# EAGLE board POE_Power_Supply-Panel (EAGLE 9.6.2)
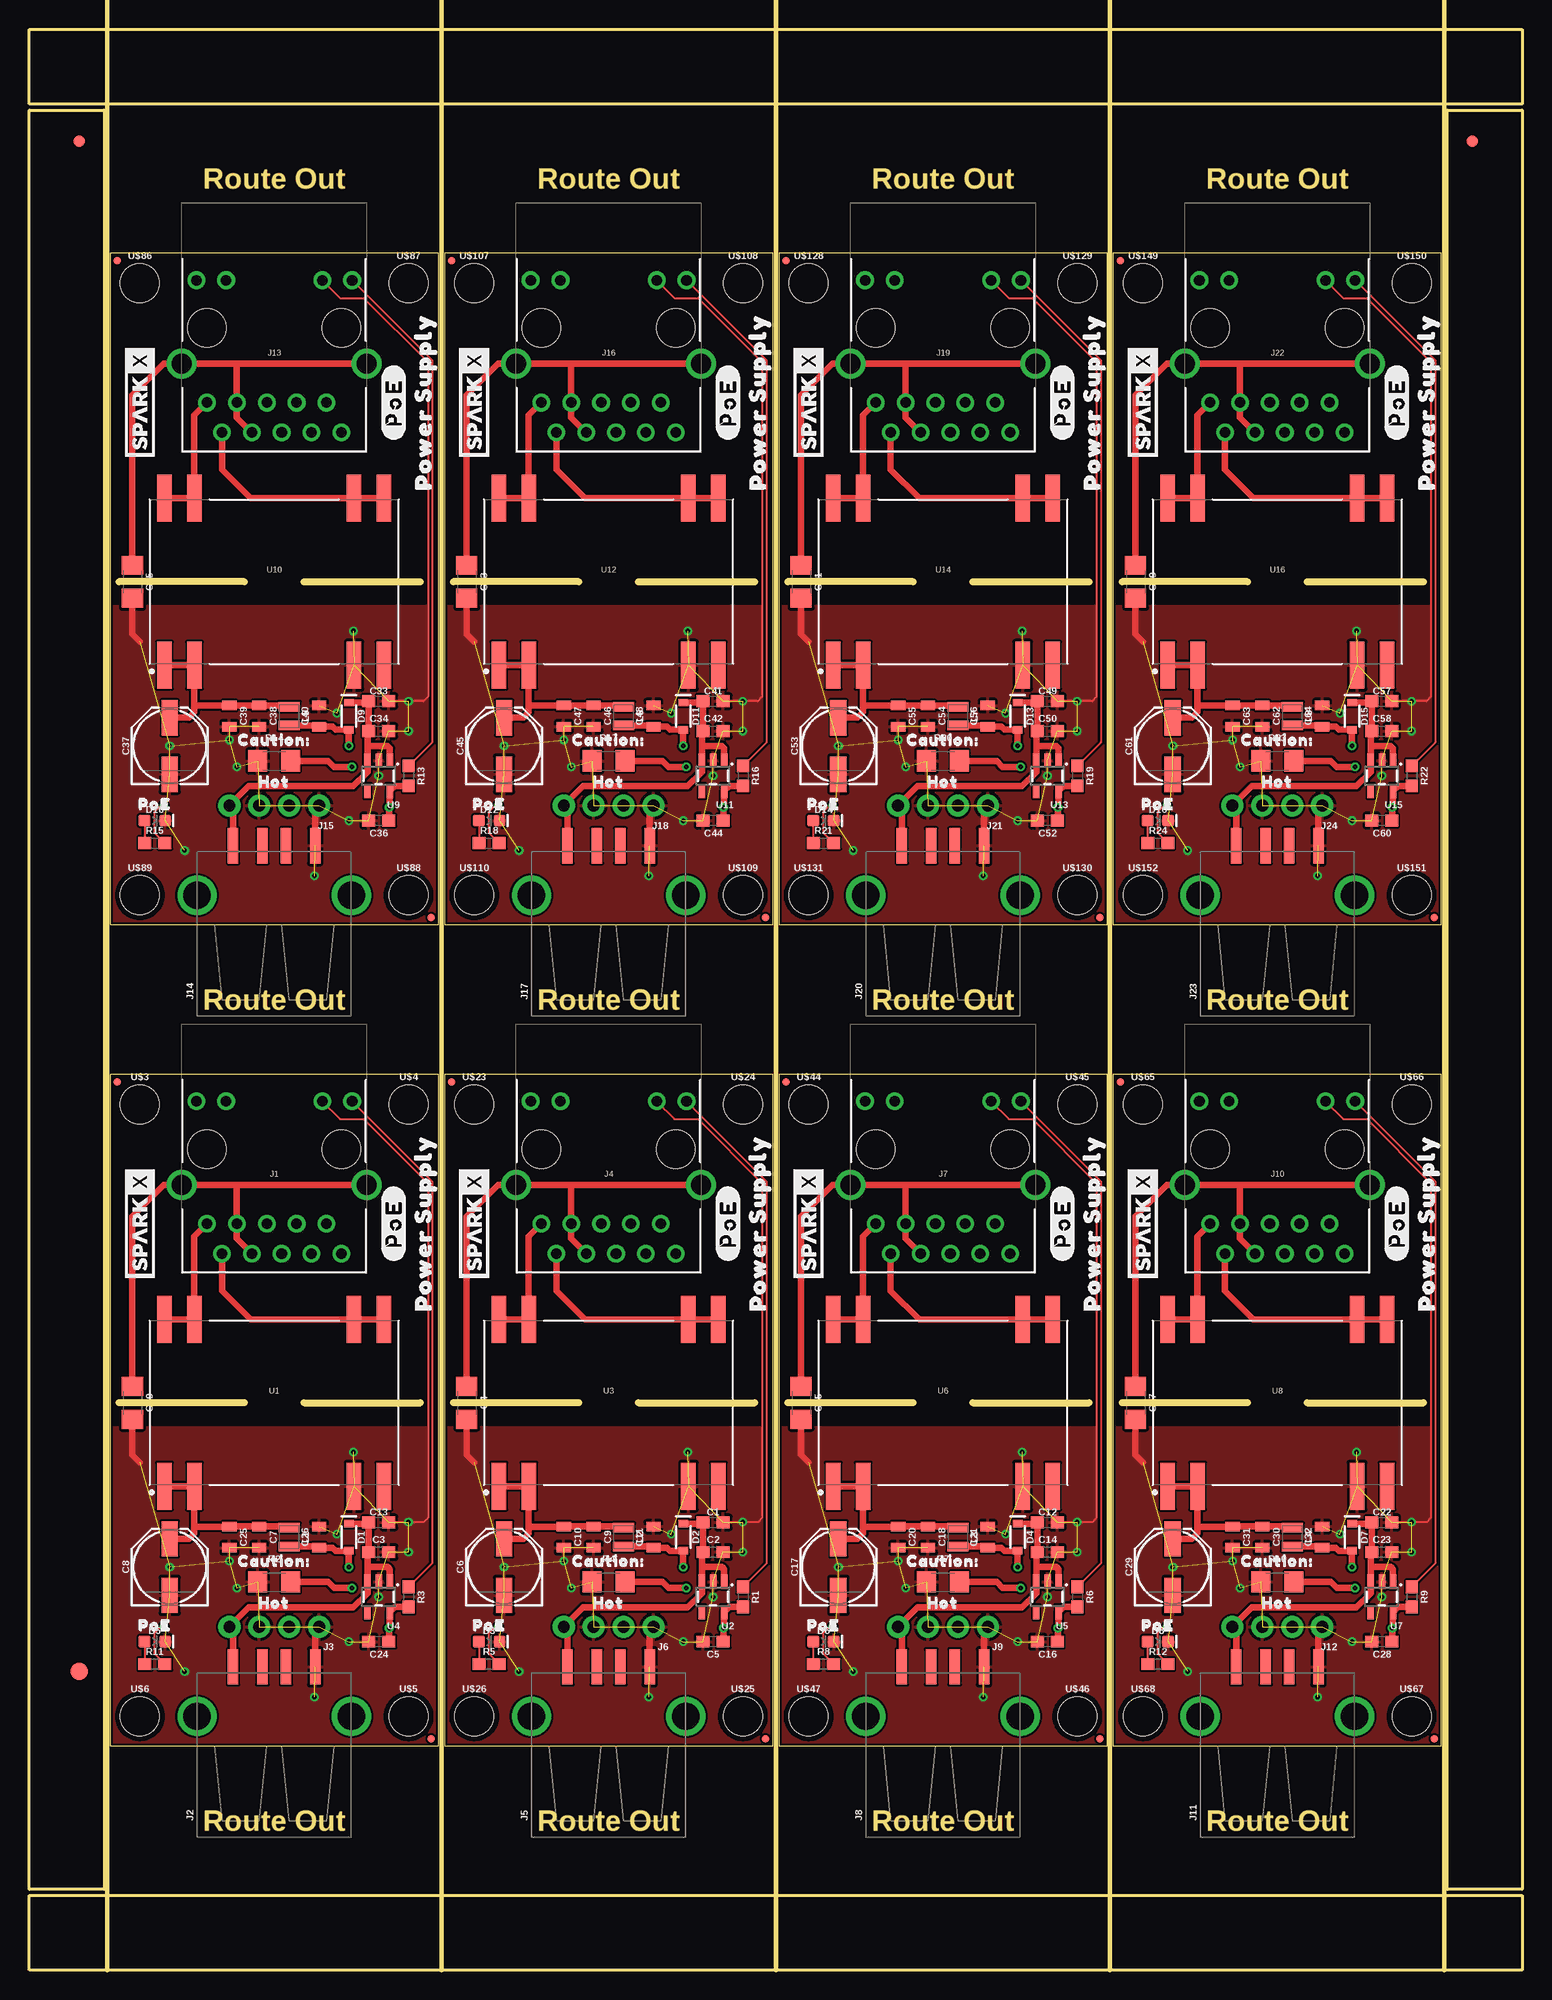
[diagram p0: board, top side]
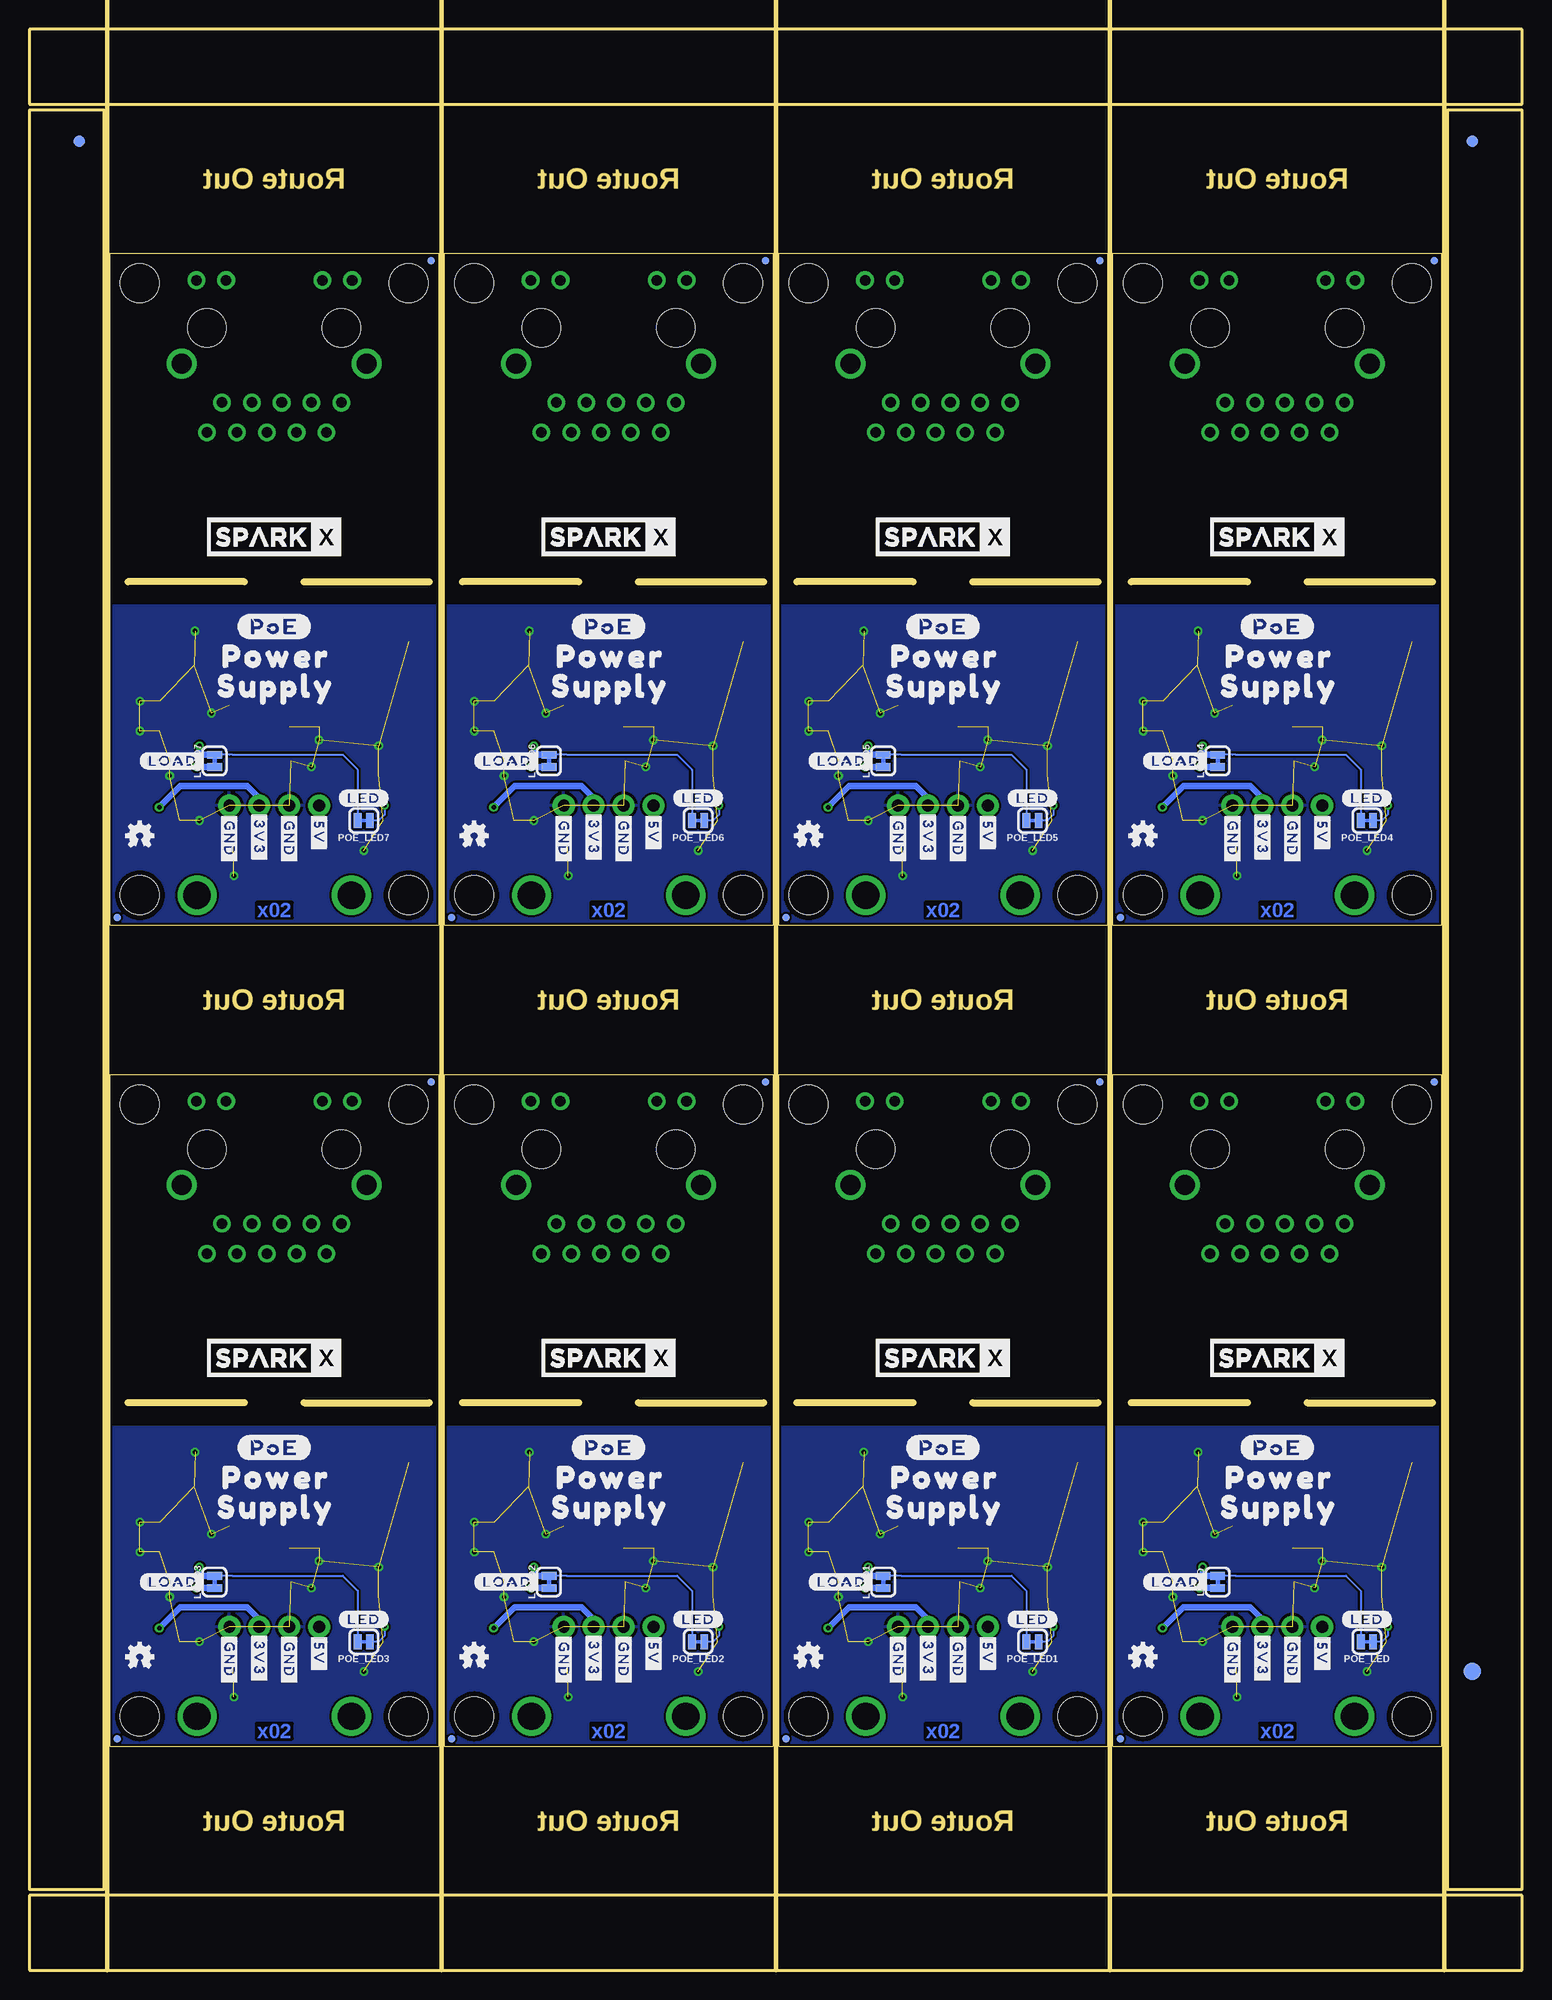
[diagram p1: board, bottom side, seen from below]

Size 127 x 165.1 mm. Coordinates in mm from the lower left corner, seen from the top.
Outline: 34.8,19.05 34.8,76.2 6.86,76.2 6.86,19.05 34.8,19.05
Outline: 63.25,19.05 63.25,76.2 35.31,76.2 35.31,19.05 63.25,19.05
Outline: 91.69,19.05 91.69,76.2 63.75,76.2 63.75,19.05 91.69,19.05
Outline: 120.14,19.05 120.14,76.2 92.2,76.2 92.2,19.05 120.14,19.05
Outline: 34.8,88.9 34.8,146.05 6.86,146.05 6.86,88.9 34.8,88.9
Outline: 63.25,88.9 63.25,146.05 35.31,146.05 35.31,88.9 63.25,88.9
Outline: 91.69,88.9 91.69,146.05 63.75,146.05 63.75,88.9 91.69,88.9
Outline: 120.14,88.9 120.14,146.05 92.2,146.05 92.2,88.9 120.14,88.9
Outline: 0,6.35 127,6.35 127,0 0,0 0,6.35
Outline: 120.65,158.24 127,158.24 127,6.86 120.65,6.86 120.65,158.24
Outline: 0,165.1 127,165.1 127,158.75 0,158.75 0,165.1
Outline: 0,158.24 6.35,158.24 6.35,6.86 0,6.86 0,158.24
Copper layers (1*16): Top 0.035mm / dielectric 1.5mm / Bottom 0.035mm
Design rules "POE_Power_Supply": minimum track width 7mil, minimum drill 12mil, track to track 7mil, track to pad 7mil, pad to pad 7mil, via to via 7mil, smd to smd 7mil, copper to edge 7mil, drill to drill 7mil, minimum pad ring 7mil, minimum via ring 7mil, stop-mask expansion 4mil, vias tented up to drill 25mil, thermal gap 10mil
Net classes: 0 default: width 0 mm, drill 0 mm
Milling: 21 lines

## Footprints (pad centres in the part's own frame; a part is rotated, then mirrored left to right if it is on the bottom)
0603 = smd 1.1 x 1: 1 -0.85,0; 2 0.85,0
1206 = smd 1.6 x 1.8: 1 -1.4,0; 2 1.4,0
PANASONIC_D = smd 3 x 1.4: + 2.4,0; - -2.4,0
0805 = smd 0.8 x 1.2: 1 -0.9,0; 2 0.9,0
SOD-323 = smd 0.63 x 0.83: A 1.15,0; C -1.15,0
LED-0603 = smd 1 x 1: A -0.877,0; C 0.877,0
FIDUCIAL-1X2 = smd 1 x 1: 1 0,0
FIDUCIAL-1.5X3 = smd 1.5 x 1.5: 1 0,0
FIDUCIAL-MICRO = smd 0.635 x 0.635: 1 0,0
MAGJACK-SYM_LED = drill 0.9 pad 1.5: 1 -5.715,8.89; 2 -4.445,6.35; 3 -3.175,8.89; 4 -1.905,6.35; 5 -0.635,8.89; 6 0.635,6.35; 7 1.905,8.89; 8 3.175,6.35; 9 4.445,8.89; 10 5.715,6.35; 11 -6.63,-4.06; 12 -4.09,-4.06; 13 4.09,-4.06; 14 6.63,-4.06 | drill 1.7 pad 2.4: S1 -7.875,3.05; S2 7.875,3.05 | hole 3.25: -5.715,0; 5.715,0
USB-A-S-NOSILK-FEMALE = smd 3 x 0.9: D+ 6.752,-1; D- 6.752,1; GND 6.752,-3.5; VBUS 6.752,3.5 | drill 2.311: SHLD1 2.54,-6.566; SHLD2 2.54,6.566
1X04_NO_SILK = drill 1.016 pad 1.88: 1 0,0; 2 2.54,0; 3 5.08,0; 4 7.62,0
0805-WIDE = smd 0.8 x 1.8: 1 -0.8,0; 2 0.8,0
SMT-JUMPER_2_NC_TRACE_SILK = smd 0.66 x 1.27: 1 -0.521,0; 2 0.521,0
DP990X = smd 1.25 x 4: 1 -9.33,-7.1; 2 -6.79,-7.1; 3 6.79,-7.1; 4 9.33,-7.1; 5 9.33,7.1; 6 6.79,7.1; 7 -6.79,7.1; 8 -9.33,7.1
SOT23-5 = smd 0.55 x 1.2: 1 -0.95,-1.3; 2 0,-1.3; 3 0.95,-1.3; 4 0.95,1.3; 5 -0.95,1.3
STAND-OFF = hole 3.302: 0,0

## Placement (x,y rotation side)
C1  0.22uF  [0603]  58.17,38.1 0 top
C2  0.1uF  [0603]  58.17,35.56 0 top
C3  0.1uF  [0603]  29.72,35.56 0 top
C4  1nF  [1206]  37.21,48.26 270 top
C5  1.0uF  [0603]  58.17,27.94 180 top
C6  100uF  [PANASONIC_D]  40.39,34.29 90 top
C7  10uF  [0805]  19.56,36.83 270 top
C8  100uF  [PANASONIC_D]  11.94,34.29 90 top
C9  10uF  [0805]  48.01,36.83 270 top
C10  10uF  [0805]  45.47,36.83 270 top
C11  10uF  [0805]  53.09,36.83 90 top
C12  0.22uF  [0603]  86.61,38.1 0 top
C13  0.22uF  [0603]  29.72,38.1 0 top
C14  0.1uF  [0603]  86.61,35.56 0 top
C15  1nF  [1206]  65.66,48.26 270 top
C16  1.0uF  [0603]  86.61,27.94 180 top
C17  100uF  [PANASONIC_D]  68.83,34.29 90 top
C18  10uF  [0805]  76.45,36.83 270 top
C19  1nF  [1206]  8.76,48.26 270 top
C20  10uF  [0805]  73.91,36.83 270 top
C21  10uF  [0805]  81.53,36.83 90 top
C22  0.22uF  [0603]  115.06,38.1 0 top
C23  0.1uF  [0603]  115.06,35.56 0 top
C24  1.0uF  [0603]  29.72,27.94 180 top
C25  10uF  [0805]  17.02,36.83 270 top
C26  10uF  [0805]  24.64,36.83 90 top
C27  1nF  [1206]  94.11,48.26 270 top
C28  1.0uF  [0603]  115.06,27.94 180 top
C29  100uF  [PANASONIC_D]  97.28,34.29 90 top
C30  10uF  [0805]  104.9,36.83 270 top
C31  10uF  [0805]  102.36,36.83 270 top
C32  10uF  [0805]  109.98,36.83 90 top
C33  0.22uF  [0603]  29.72,107.95 0 top
C34  0.1uF  [0603]  29.72,105.41 0 top
C35  1nF  [1206]  8.76,118.11 270 top
C36  1.0uF  [0603]  29.72,97.79 180 top
C37  100uF  [PANASONIC_D]  11.94,104.14 90 top
C38  10uF  [0805]  19.56,106.68 270 top
C39  10uF  [0805]  17.02,106.68 270 top
C40  10uF  [0805]  24.64,106.68 90 top
C41  0.22uF  [0603]  58.17,107.95 0 top
C42  0.1uF  [0603]  58.17,105.41 0 top
C43  1nF  [1206]  37.21,118.11 270 top
C44  1.0uF  [0603]  58.17,97.79 180 top
C45  100uF  [PANASONIC_D]  40.39,104.14 90 top
C46  10uF  [0805]  48.01,106.68 270 top
C47  10uF  [0805]  45.47,106.68 270 top
C48  10uF  [0805]  53.09,106.68 90 top
C49  0.22uF  [0603]  86.61,107.95 0 top
C50  0.1uF  [0603]  86.61,105.41 0 top
C51  1nF  [1206]  65.66,118.11 270 top
C52  1.0uF  [0603]  86.61,97.79 180 top
C53  100uF  [PANASONIC_D]  68.83,104.14 90 top
C54  10uF  [0805]  76.45,106.68 270 top
C55  10uF  [0805]  73.91,106.68 270 top
C56  10uF  [0805]  81.53,106.68 90 top
C57  0.22uF  [0603]  115.06,107.95 0 top
C58  0.1uF  [0603]  115.06,105.41 0 top
C59  1nF  [1206]  94.11,118.11 270 top
C60  1.0uF  [0603]  115.06,97.79 180 top
C61  100uF  [PANASONIC_D]  97.28,104.14 90 top
C62  10uF  [0805]  104.9,106.68 270 top
C63  10uF  [0805]  102.36,106.68 270 top
C64  10uF  [0805]  109.98,106.68 90 top
D1  3A/10V/280mV  [SOD-323]  27.18,36.83 270 top
D2  3A/10V/280mV  [SOD-323]  55.63,36.83 270 top
D3  RED  [LED-0603]  39.12,27.94 0 top
D4  3A/10V/280mV  [SOD-323]  84.07,36.83 270 top
D5  RED  [LED-0603]  10.67,27.94 0 top
D6  RED  [LED-0603]  67.56,27.94 0 top
D7  3A/10V/280mV  [SOD-323]  112.52,36.83 270 top
D8  RED  [LED-0603]  96.01,27.94 0 top
D9  3A/10V/280mV  [SOD-323]  27.18,106.68 270 top
D10  RED  [LED-0603]  10.67,97.79 0 top
D11  3A/10V/280mV  [SOD-323]  55.63,106.68 270 top
D12  RED  [LED-0603]  39.12,97.79 0 top
D13  3A/10V/280mV  [SOD-323]  84.07,106.68 270 top
D14  RED  [LED-0603]  67.56,97.79 0 top
D15  3A/10V/280mV  [SOD-323]  112.52,106.68 270 top
D16  RED  [LED-0603]  96.01,97.79 0 top
E$1  [FIDUCIAL-1X2]  4.23,155.58 0 top
E$2  [FIDUCIAL-1X2]  4.23,155.58 0 bottom
E$3  [FIDUCIAL-1X2]  122.77,155.58 0 top
E$4  [FIDUCIAL-1X2]  122.77,155.58 0 bottom
E$5  [FIDUCIAL-1.5X3]  4.23,25.4 0 top
E$6  [FIDUCIAL-1.5X3]  4.23,25.4 0 bottom
FD1  FIDUCIALUFIDUCIAL  [FIDUCIAL-MICRO]  34.16,19.69 90 top
FD2  FIDUCIALUFIDUCIAL  [FIDUCIAL-MICRO]  7.49,75.56 90 top
FD3  FIDUCIALUFIDUCIAL  [FIDUCIAL-MICRO]  34.16,19.69 270 bottom
FD4  FIDUCIALUFIDUCIAL  [FIDUCIAL-MICRO]  7.49,75.56 270 bottom
FD5  FIDUCIALUFIDUCIAL  [FIDUCIAL-MICRO]  62.61,19.69 90 top
FD6  FIDUCIALUFIDUCIAL  [FIDUCIAL-MICRO]  35.94,75.56 90 top
FD7  FIDUCIALUFIDUCIAL  [FIDUCIAL-MICRO]  62.61,19.69 270 bottom
FD8  FIDUCIALUFIDUCIAL  [FIDUCIAL-MICRO]  35.94,75.56 270 bottom
FD9  FIDUCIALUFIDUCIAL  [FIDUCIAL-MICRO]  91.06,19.69 90 top
FD10  FIDUCIALUFIDUCIAL  [FIDUCIAL-MICRO]  64.39,75.56 90 top
FD11  FIDUCIALUFIDUCIAL  [FIDUCIAL-MICRO]  91.06,19.69 270 bottom
FD12  FIDUCIALUFIDUCIAL  [FIDUCIAL-MICRO]  64.39,75.56 270 bottom
FD13  FIDUCIALUFIDUCIAL  [FIDUCIAL-MICRO]  119.51,19.69 90 top
FD14  FIDUCIALUFIDUCIAL  [FIDUCIAL-MICRO]  92.84,75.56 90 top
FD15  FIDUCIALUFIDUCIAL  [FIDUCIAL-MICRO]  119.51,19.69 270 bottom
FD16  FIDUCIALUFIDUCIAL  [FIDUCIAL-MICRO]  92.84,75.56 270 bottom
FD17  FIDUCIALUFIDUCIAL  [FIDUCIAL-MICRO]  34.16,89.53 90 top
FD18  FIDUCIALUFIDUCIAL  [FIDUCIAL-MICRO]  7.49,145.41 90 top
FD19  FIDUCIALUFIDUCIAL  [FIDUCIAL-MICRO]  34.16,89.53 270 bottom
FD20  FIDUCIALUFIDUCIAL  [FIDUCIAL-MICRO]  7.49,145.41 270 bottom
FD21  FIDUCIALUFIDUCIAL  [FIDUCIAL-MICRO]  62.61,89.53 90 top
FD22  FIDUCIALUFIDUCIAL  [FIDUCIAL-MICRO]  35.94,145.41 90 top
FD23  FIDUCIALUFIDUCIAL  [FIDUCIAL-MICRO]  62.61,89.53 270 bottom
FD24  FIDUCIALUFIDUCIAL  [FIDUCIAL-MICRO]  35.94,145.41 270 bottom
FD25  FIDUCIALUFIDUCIAL  [FIDUCIAL-MICRO]  91.06,89.53 90 top
FD26  FIDUCIALUFIDUCIAL  [FIDUCIAL-MICRO]  64.39,145.41 90 top
FD27  FIDUCIALUFIDUCIAL  [FIDUCIAL-MICRO]  91.06,89.53 270 bottom
FD28  FIDUCIALUFIDUCIAL  [FIDUCIAL-MICRO]  64.39,145.41 270 bottom
FD29  FIDUCIALUFIDUCIAL  [FIDUCIAL-MICRO]  119.51,89.53 90 top
FD30  FIDUCIALUFIDUCIAL  [FIDUCIAL-MICRO]  92.84,145.41 90 top
FD31  FIDUCIALUFIDUCIAL  [FIDUCIAL-MICRO]  119.51,89.53 270 bottom
FD32  FIDUCIALUFIDUCIAL  [FIDUCIAL-MICRO]  92.84,145.41 270 bottom
J1  MAGJACK-POE  [MAGJACK-SYM_LED]  20.83,69.85 180 top
J2  USB_A_SMT_FEMALE_NS  [USB-A-S-NOSILK-FEMALE]  20.83,19.05 90 top
J3  [1X04_NO_SILK]  24.64,29.21 180 top
J4  MAGJACK-POE  [MAGJACK-SYM_LED]  49.28,69.85 180 top
J5  USB_A_SMT_FEMALE_NS  [USB-A-S-NOSILK-FEMALE]  49.28,19.05 90 top
J6  [1X04_NO_SILK]  53.09,29.21 180 top
J7  MAGJACK-POE  [MAGJACK-SYM_LED]  77.72,69.85 180 top
J8  USB_A_SMT_FEMALE_NS  [USB-A-S-NOSILK-FEMALE]  77.72,19.05 90 top
J9  [1X04_NO_SILK]  81.53,29.21 180 top
J10  MAGJACK-POE  [MAGJACK-SYM_LED]  106.17,69.85 180 top
J11  USB_A_SMT_FEMALE_NS  [USB-A-S-NOSILK-FEMALE]  106.17,19.05 90 top
J12  [1X04_NO_SILK]  109.98,29.21 180 top
J13  MAGJACK-POE  [MAGJACK-SYM_LED]  20.83,139.7 180 top
J14  USB_A_SMT_FEMALE_NS  [USB-A-S-NOSILK-FEMALE]  20.83,88.9 90 top
J15  [1X04_NO_SILK]  24.64,99.06 180 top
J16  MAGJACK-POE  [MAGJACK-SYM_LED]  49.28,139.7 180 top
J17  USB_A_SMT_FEMALE_NS  [USB-A-S-NOSILK-FEMALE]  49.28,88.9 90 top
J18  [1X04_NO_SILK]  53.09,99.06 180 top
J19  MAGJACK-POE  [MAGJACK-SYM_LED]  77.72,139.7 180 top
J20  USB_A_SMT_FEMALE_NS  [USB-A-S-NOSILK-FEMALE]  77.72,88.9 90 top
J21  [1X04_NO_SILK]  81.53,99.06 180 top
J22  MAGJACK-POE  [MAGJACK-SYM_LED]  106.17,139.7 180 top
J23  USB_A_SMT_FEMALE_NS  [USB-A-S-NOSILK-FEMALE]  106.17,88.9 90 top
J24  [1X04_NO_SILK]  109.98,99.06 180 top
L1  2.2uH  [0805-WIDE]  22.1,36.83 270 top
L2  2.2uH  [0805-WIDE]  50.55,36.83 270 top
L3  2.2uH  [0805-WIDE]  78.99,36.83 270 top
L4  2.2uH  [0805-WIDE]  107.44,36.83 270 top
L5  2.2uH  [0805-WIDE]  22.1,106.68 270 top
L6  2.2uH  [0805-WIDE]  50.55,106.68 270 top
L7  2.2uH  [0805-WIDE]  78.99,106.68 270 top
L8  2.2uH  [0805-WIDE]  107.44,106.68 270 top
LOAD  JUMPER-SMT_2_NC_TRACE_SILK  [SMT-JUMPER_2_NC_TRACE_SILK]  25.91,33.02 90 bottom
LOAD1  JUMPER-SMT_2_NC_TRACE_SILK  [SMT-JUMPER_2_NC_TRACE_SILK]  54.36,33.02 90 bottom
LOAD2  JUMPER-SMT_2_NC_TRACE_SILK  [SMT-JUMPER_2_NC_TRACE_SILK]  82.8,33.02 90 bottom
LOAD3  JUMPER-SMT_2_NC_TRACE_SILK  [SMT-JUMPER_2_NC_TRACE_SILK]  111.25,33.02 90 bottom
LOAD4  JUMPER-SMT_2_NC_TRACE_SILK  [SMT-JUMPER_2_NC_TRACE_SILK]  25.91,102.87 90 bottom
LOAD5  JUMPER-SMT_2_NC_TRACE_SILK  [SMT-JUMPER_2_NC_TRACE_SILK]  54.36,102.87 90 bottom
LOAD6  JUMPER-SMT_2_NC_TRACE_SILK  [SMT-JUMPER_2_NC_TRACE_SILK]  82.8,102.87 90 bottom
LOAD7  JUMPER-SMT_2_NC_TRACE_SILK  [SMT-JUMPER_2_NC_TRACE_SILK]  111.25,102.87 90 bottom
LOGO1  OSHW-LOGOMINI  [OSHW-LOGO-MINI]  60.71,26.67 0 bottom
LOGO2  OSHW-LOGOMINI  [OSHW-LOGO-MINI]  89.15,26.67 0 bottom
LOGO3  OSHW-LOGOMINI  [OSHW-LOGO-MINI]  32.26,26.67 0 bottom
LOGO4  OSHW-LOGOMINI  [OSHW-LOGO-MINI]  117.6,26.67 0 bottom
LOGO5  OSHW-LOGOMINI  [OSHW-LOGO-MINI]  32.26,96.52 0 bottom
LOGO6  OSHW-LOGOMINI  [OSHW-LOGO-MINI]  60.71,96.52 0 bottom
LOGO7  OSHW-LOGOMINI  [OSHW-LOGO-MINI]  89.15,96.52 0 bottom
LOGO8  OSHW-LOGOMINI  [OSHW-LOGO-MINI]  117.6,96.52 0 bottom
POE_LED  JUMPER-SMT_2_NC_TRACE_SILK  [SMT-JUMPER_2_NC_TRACE_SILK]  13.21,27.94 180 bottom
POE_LED1  JUMPER-SMT_2_NC_TRACE_SILK  [SMT-JUMPER_2_NC_TRACE_SILK]  41.66,27.94 180 bottom
POE_LED2  JUMPER-SMT_2_NC_TRACE_SILK  [SMT-JUMPER_2_NC_TRACE_SILK]  70.1,27.94 180 bottom
POE_LED3  JUMPER-SMT_2_NC_TRACE_SILK  [SMT-JUMPER_2_NC_TRACE_SILK]  98.55,27.94 180 bottom
POE_LED4  JUMPER-SMT_2_NC_TRACE_SILK  [SMT-JUMPER_2_NC_TRACE_SILK]  13.21,97.79 180 bottom
POE_LED5  JUMPER-SMT_2_NC_TRACE_SILK  [SMT-JUMPER_2_NC_TRACE_SILK]  41.66,97.79 180 bottom
POE_LED6  JUMPER-SMT_2_NC_TRACE_SILK  [SMT-JUMPER_2_NC_TRACE_SILK]  70.1,97.79 180 bottom
POE_LED7  JUMPER-SMT_2_NC_TRACE_SILK  [SMT-JUMPER_2_NC_TRACE_SILK]  98.55,97.79 180 bottom
R1  330  [0603]  60.71,31.75 270 top
R2  49.9OHM-1206-1/2W-1%  [1206]  20.83,33.02 0 top
R3  330  [0603]  32.26,31.75 270 top
R4  49.9OHM-1206-1/2W-1%  [1206]  49.28,33.02 0 top
R5  1k  [0603]  39.12,26.04 0 top
R6  330  [0603]  89.15,31.75 270 top
R7  49.9OHM-1206-1/2W-1%  [1206]  77.72,33.02 0 top
R8  1k  [0603]  67.56,26.04 0 top
R9  330  [0603]  117.6,31.75 270 top
R10  49.9OHM-1206-1/2W-1%  [1206]  106.17,33.02 0 top
R11  1k  [0603]  10.67,26.04 0 top
R12  1k  [0603]  96.01,26.04 0 top
R13  330  [0603]  32.26,101.6 270 top
R14  49.9OHM-1206-1/2W-1%  [1206]  20.83,102.87 0 top
R15  1k  [0603]  10.67,95.88 0 top
R16  330  [0603]  60.71,101.6 270 top
R17  49.9OHM-1206-1/2W-1%  [1206]  49.28,102.87 0 top
R18  1k  [0603]  39.12,95.88 0 top
R19  330  [0603]  89.15,101.6 270 top
R20  49.9OHM-1206-1/2W-1%  [1206]  77.72,102.87 0 top
R21  1k  [0603]  67.56,95.88 0 top
R22  330  [0603]  117.6,101.6 270 top
R23  49.9OHM-1206-1/2W-1%  [1206]  106.17,102.87 0 top
R24  1k  [0603]  96.01,95.88 0 top
U1  POE_PSU-DP990X  [DP990X]  20.83,48.26 0 top
U2  3.3V  [SOT23-5]  58.17,31.75 180 top
U3  POE_PSU-DP990X  [DP990X]  49.28,48.26 0 top
U4  3.3V  [SOT23-5]  29.72,31.75 180 top
U5  3.3V  [SOT23-5]  86.61,31.75 180 top
U6  POE_PSU-DP990X  [DP990X]  77.72,48.26 0 top
U7  3.3V  [SOT23-5]  115.06,31.75 180 top
U8  POE_PSU-DP990X  [DP990X]  106.17,48.26 0 top
U9  3.3V  [SOT23-5]  29.72,101.6 180 top
U10  POE_PSU-DP990X  [DP990X]  20.83,118.11 0 top
U11  3.3V  [SOT23-5]  58.17,101.6 180 top
U12  POE_PSU-DP990X  [DP990X]  49.28,118.11 0 top
U13  3.3V  [SOT23-5]  86.61,101.6 180 top
U14  POE_PSU-DP990X  [DP990X]  77.72,118.11 0 top
U15  3.3V  [SOT23-5]  115.06,101.6 180 top
U16  POE_PSU-DP990X  [DP990X]  106.17,118.11 0 top
U$1  [#POE#0]  20.83,44.45 0 bottom
U$2  [#POE#0]  59.44,63.5 90 top
U$3  [STAND-OFF]  9.4,73.66 0 top
U$4  [STAND-OFF]  32.26,73.66 0 top
U$5  [STAND-OFF]  32.26,21.59 0 top
U$6  [STAND-OFF]  9.4,21.59 0 top
U$7  SPARKX-LOGO4  [SPARKX-MEDIUM]  9.4,63.5 90 top
U$8  [#LED#0]  13.21,29.84 0 bottom
U$9  [#LOAD#0]  29.46,33.02 0 bottom
U$10  [#3V3#0]  22.1,26.54 270 bottom
U$11  [#5V#2]  17.02,26.92 270 bottom
U$12  [#GND#1]  19.56,26.42 270 bottom
U$13  [#GND#1]  24.64,26.42 270 bottom
U$14  [CAUTION#0]  20.83,34.8 0 top
U$15  [HOT1]  20.83,31.24 0 top
U$16  [POE0]  10.67,29.34 0 top
U$17  [POWER_0]  20.32,41.91 0 bottom
U$18  [#POE#0]  30.99,63.5 90 top
U$19  SPARKX-LOGO4  [SPARKX-LARGE]  20.83,52.07 0 bottom
U$20  [POWER0]  33.53,59.56 90 top
U$21  [SUPPLY1]  33.53,67.31 90 top
U$22  [SUPPLY_1]  20.32,39.37 0 bottom
U$23  [STAND-OFF]  37.85,73.66 0 top
U$24  [STAND-OFF]  60.71,73.66 0 top
U$25  [STAND-OFF]  60.71,21.59 0 top
U$26  [STAND-OFF]  37.85,21.59 0 top
U$27  [#LED#0]  41.66,29.84 0 bottom
U$28  [#LOAD#0]  57.91,33.02 0 bottom
U$29  [#3V3#0]  50.55,26.54 270 bottom
U$30  [#5V#2]  45.47,26.92 270 bottom
U$31  [#GND#1]  48.01,26.42 270 bottom
U$32  [#GND#1]  53.09,26.42 270 bottom
U$33  [CAUTION#0]  49.28,34.8 0 top
U$34  [HOT1]  49.28,31.24 0 top
U$35  [POE0]  39.12,29.34 0 top
U$36  SPARKX-LOGO4  [SPARKX-MEDIUM]  37.85,63.5 90 top
U$37  SPARKX-LOGO4  [SPARKX-LARGE]  49.28,52.07 0 bottom
U$38  [POWER0]  61.98,59.56 90 top
U$39  [SUPPLY1]  61.98,67.31 90 top
U$40  [POWER_0]  48.77,41.91 0 bottom
U$41  [SUPPLY_1]  48.77,39.37 0 bottom
U$42  [#POE#0]  49.28,44.45 0 bottom
U$43  [#POE#0]  87.88,63.5 90 top
U$44  [STAND-OFF]  66.29,73.66 0 top
U$45  [STAND-OFF]  89.15,73.66 0 top
U$46  [STAND-OFF]  89.15,21.59 0 top
U$47  [STAND-OFF]  66.29,21.59 0 top
U$48  [#LED#0]  70.1,29.84 0 bottom
U$49  [#LOAD#0]  86.36,33.02 0 bottom
U$50  [#3V3#0]  78.99,26.54 270 bottom
U$51  [#5V#2]  73.91,26.92 270 bottom
U$52  [#GND#1]  76.45,26.42 270 bottom
U$53  [#GND#1]  81.53,26.42 270 bottom
U$54  [CAUTION#0]  77.72,34.8 0 top
U$55  [HOT1]  77.72,31.24 0 top
U$56  [POE0]  67.56,29.34 0 top
U$57  SPARKX-LOGO4  [SPARKX-MEDIUM]  66.29,63.5 90 top
U$58  SPARKX-LOGO4  [SPARKX-LARGE]  77.72,52.07 0 bottom
U$59  [POWER0]  90.42,59.56 90 top
U$60  [SUPPLY1]  90.42,67.31 90 top
U$61  [POWER_0]  77.22,41.91 0 bottom
U$62  [SUPPLY_1]  77.22,39.37 0 bottom
U$63  [#POE#0]  77.72,44.45 0 bottom
U$64  [#POE#0]  116.33,63.5 90 top
U$65  [STAND-OFF]  94.74,73.66 0 top
U$66  [STAND-OFF]  117.6,73.66 0 top
U$67  [STAND-OFF]  117.6,21.59 0 top
U$68  [STAND-OFF]  94.74,21.59 0 top
U$69  [#LED#0]  98.55,29.84 0 bottom
U$70  [#LOAD#0]  114.81,33.02 0 bottom
U$71  [#3V3#0]  107.44,26.54 270 bottom
U$72  [#5V#2]  102.36,26.92 270 bottom
U$73  [#GND#1]  104.9,26.42 270 bottom
U$74  [#GND#1]  109.98,26.42 270 bottom
U$75  [CAUTION#0]  106.17,34.8 0 top
U$76  [HOT1]  106.17,31.24 0 top
U$77  [POE0]  96.01,29.34 0 top
U$78  SPARKX-LOGO4  [SPARKX-MEDIUM]  94.74,63.5 90 top
U$79  SPARKX-LOGO4  [SPARKX-LARGE]  106.17,52.07 0 bottom
U$80  [POWER0]  118.87,59.56 90 top
U$81  [SUPPLY1]  118.87,67.31 90 top
U$82  [POWER_0]  105.66,41.91 0 bottom
U$83  [SUPPLY_1]  105.66,39.37 0 bottom
U$84  [#POE#0]  106.17,44.45 0 bottom
U$85  [#POE#0]  30.99,133.35 90 top
U$86  [STAND-OFF]  9.4,143.51 0 top
U$87  [STAND-OFF]  32.26,143.51 0 top
U$88  [STAND-OFF]  32.26,91.44 0 top
U$89  [STAND-OFF]  9.4,91.44 0 top
U$90  [#LED#0]  13.21,99.69 0 bottom
U$91  [#LOAD#0]  29.46,102.87 0 bottom
U$92  [#3V3#0]  22.1,96.39 270 bottom
U$93  [#5V#2]  17.02,96.77 270 bottom
U$94  [#GND#1]  19.56,96.27 270 bottom
U$95  [#GND#1]  24.64,96.27 270 bottom
U$96  [CAUTION#0]  20.83,104.65 0 top
U$97  [HOT1]  20.83,101.09 0 top
U$98  [POE0]  10.67,99.19 0 top
U$99  SPARKX-LOGO4  [SPARKX-MEDIUM]  9.4,133.35 90 top
U$100  SPARKX-LOGO4  [SPARKX-LARGE]  20.83,121.92 0 bottom
U$101  [POWER0]  33.53,129.41 90 top
U$102  [SUPPLY1]  33.53,137.16 90 top
U$103  [POWER_0]  20.32,111.76 0 bottom
U$104  [SUPPLY_1]  20.32,109.22 0 bottom
U$105  [#POE#0]  20.83,114.3 0 bottom
U$106  [#POE#0]  59.44,133.35 90 top
U$107  [STAND-OFF]  37.85,143.51 0 top
U$108  [STAND-OFF]  60.71,143.51 0 top
U$109  [STAND-OFF]  60.71,91.44 0 top
U$110  [STAND-OFF]  37.85,91.44 0 top
U$111  [#LED#0]  41.66,99.69 0 bottom
U$112  [#LOAD#0]  57.91,102.87 0 bottom
U$113  [#3V3#0]  50.55,96.39 270 bottom
U$114  [#5V#2]  45.47,96.77 270 bottom
U$115  [#GND#1]  48.01,96.27 270 bottom
U$116  [#GND#1]  53.09,96.27 270 bottom
U$117  [CAUTION#0]  49.28,104.65 0 top
U$118  [HOT1]  49.28,101.09 0 top
U$119  [POE0]  39.12,99.19 0 top
U$120  SPARKX-LOGO4  [SPARKX-MEDIUM]  37.85,133.35 90 top
U$121  SPARKX-LOGO4  [SPARKX-LARGE]  49.28,121.92 0 bottom
U$122  [POWER0]  61.98,129.41 90 top
U$123  [SUPPLY1]  61.98,137.16 90 top
U$124  [POWER_0]  48.77,111.76 0 bottom
U$125  [SUPPLY_1]  48.77,109.22 0 bottom
U$126  [#POE#0]  49.28,114.3 0 bottom
U$127  [#POE#0]  87.88,133.35 90 top
U$128  [STAND-OFF]  66.29,143.51 0 top
U$129  [STAND-OFF]  89.15,143.51 0 top
U$130  [STAND-OFF]  89.15,91.44 0 top
U$131  [STAND-OFF]  66.29,91.44 0 top
U$132  [#LED#0]  70.1,99.69 0 bottom
U$133  [#LOAD#0]  86.36,102.87 0 bottom
U$134  [#3V3#0]  78.99,96.39 270 bottom
U$135  [#5V#2]  73.91,96.77 270 bottom
U$136  [#GND#1]  76.45,96.27 270 bottom
U$137  [#GND#1]  81.53,96.27 270 bottom
U$138  [CAUTION#0]  77.72,104.65 0 top
U$139  [HOT1]  77.72,101.09 0 top
U$140  [POE0]  67.56,99.19 0 top
U$141  SPARKX-LOGO4  [SPARKX-MEDIUM]  66.29,133.35 90 top
U$142  SPARKX-LOGO4  [SPARKX-LARGE]  77.72,121.92 0 bottom
U$143  [POWER0]  90.42,129.41 90 top
U$144  [SUPPLY1]  90.42,137.16 90 top
U$145  [POWER_0]  77.22,111.76 0 bottom
U$146  [SUPPLY_1]  77.22,109.22 0 bottom
U$147  [#POE#0]  77.72,114.3 0 bottom
U$148  [#POE#0]  116.33,133.35 90 top
U$149  [STAND-OFF]  94.74,143.51 0 top
U$150  [STAND-OFF]  117.6,143.51 0 top
U$151  [STAND-OFF]  117.6,91.44 0 top
U$152  [STAND-OFF]  94.74,91.44 0 top
U$153  [#LED#0]  98.55,99.69 0 bottom
U$154  [#LOAD#0]  114.81,102.87 0 bottom
U$155  [#3V3#0]  107.44,96.39 270 bottom
U$156  [#5V#2]  102.36,96.77 270 bottom
U$157  [#GND#1]  104.9,96.27 270 bottom
U$158  [#GND#1]  109.98,96.27 270 bottom
U$159  [CAUTION#0]  106.17,104.65 0 top
U$160  [HOT1]  106.17,101.09 0 top
U$161  [POE0]  96.01,99.19 0 top
U$162  SPARKX-LOGO4  [SPARKX-MEDIUM]  94.74,133.35 90 top
U$163  SPARKX-LOGO4  [SPARKX-LARGE]  106.17,121.92 0 bottom
U$164  [POWER0]  118.87,129.41 90 top
U$165  [SUPPLY1]  118.87,137.16 90 top
U$166  [POWER_0]  105.66,111.76 0 bottom
U$167  [SUPPLY_1]  105.66,109.22 0 bottom
U$168  [#POE#0]  106.17,114.3 0 bottom

## Library data of the parts
C1 C12 C13 C22 C33 C41 C49 C57 = SparkFun-Capacitors; PROD_ID: CAP-07822
C2 C3 C14 C23 C34 C42 C50 C58 = SparkFun-Capacitors; PROD_ID: CAP-00810
C4 C15 C19 C27 C35 C43 C51 C59 = SparkFun-Capacitors; PROD_ID: CAP-16238
C5 C16 C24 C28 C36 C44 C52 C60 = SparkFun-Capacitors; PROD_ID: CAP-13930
C6 C8 C17 C29 C37 C45 C53 C61 = SparkFun-Capacitors; PROD_ID: CAP-12547
C7 C9-C11 C18 C20 C21 C25 C26 C30-C32 C38-C40 C46-C48 C54-C56 C62-C64 = SparkFun-Capacitors; PROD_ID: CAP-14259
D1 D2 D4 D7 D9 D11 D13 D15 = SparkFun-DiscreteSemi; PROD_ID: DIO-14072
D3 D5 D6 D8 D10 D12 D14 D16 = SparkFun-LED; PROD_ID: DIO-00819
E$1-E$4 FD1-FD32 LOGO1-LOGO8 = SparkFun-Aesthetics
E$5 E$6 = SparkFun-Retired
J1 J4 J7 J10 J13 J16 J19 J22 = SparkFun-Connectors; PROD_ID: CONN-16253
J2 J5 J8 J11 J14 J17 J20 J23 = SparkFun-Connectors; PROD_ID: CONN-09520; SF_ID: PRT-09011
J3 J6 J9 J12 J15 J18 J21 J24 = SparkFun-Connectors; PROD_ID: CONN-09696
L1-L8 = SparkFun-Coils; PROD_ID: NDUC-14234
LOAD LOAD1-LOAD7 POE_LED POE_LED1-POE_LED7 = SparkFun-Jumpers
R1 R3 R6 R9 R13 R16 R19 R22 = SparkFun-Resistors; PROD_ID: RES-00818
R2 R4 R7 R10 R14 R17 R20 R23 = SparkFun-Resistors; PROD_ID: RES-16252
R5 R8 R11 R12 R15 R18 R21 R24 = SparkFun-Resistors; PROD_ID: RES-07856
U1 U3 U6 U8 U10 U12 U14 U16 = SparkFun-IC-Power; PROD_ID: IC-16251
U2 U4 U5 U7 U9 U11 U13 U15 = SparkFun-IC-Power; PROD_ID: VREG-12457
U$1 U$2 U$8-U$18 U$20-U$22 U$27-U$35 U$38-U$43 U$48-U$56 U$59-U$64 U$69-U$77 U$80-U$85 U$90-U$98 U$101-U$106 U$111-U$119 U$122-U$127 U$132-U$140 U$143-U$148 U$153-U$161 U$164-U$168 = output
U$3-U$6 U$23-U$26 U$44-U$47 U$65-U$68 U$86-U$89 U$107-U$110 U$128-U$131 U$149-U$152 = SparkFun-Hardware
U$7 U$19 U$36 U$37 U$57 U$58 U$78 U$79 U$99 U$100 U$120 U$121 U$141 U$142 U$162 U$163 = SparkX

## Nets
3.3V: C24.1 J3.2 R3.2 U4.5
3.3V1: C5.1 J6.2 R1.2 U2.5
3.3V2: C16.1 J9.2 R6.2 U5.5
3.3V3: C28.1 J12.2 R9.2 U7.5
3.3V4: C36.1 J15.2 R13.2 U9.5
3.3V5: C44.1 J18.2 R16.2 U11.5
3.3V6: C52.1 J21.2 R19.2 U13.5
3.3V7: C60.1 J24.2 R22.2 U15.5
5V: C3.1 C13.1 D1.C J2.VBUS J3.4 U4.1 U4.3
5V1: C1.1 C2.1 D2.C J5.VBUS J6.4 U2.1 U2.3
5V2: C12.1 C14.1 D4.C J8.VBUS J9.4 U5.1 U5.3
5V3: C22.1 C23.1 D7.C J11.VBUS J12.4 U7.1 U7.3
5V4: C33.1 C34.1 D9.C J14.VBUS J15.4 U9.1 U9.3
5V5: C41.1 C42.1 D11.C J17.VBUS J18.4 U11.1 U11.3
5V6: C49.1 C50.1 D13.C J20.VBUS J21.4 U13.1 U13.3
5V7: C57.1 C58.1 D15.C J23.VBUS J24.4 U15.1 U15.3
5V_FILTER: C26.1 D1.A L1.2 LOAD.2 POE_LED.2
5V_FILTER1: C11.1 D2.A L2.2 LOAD1.2 POE_LED1.2
5V_FILTER2: C21.1 D4.A L3.2 LOAD2.2 POE_LED2.2
5V_FILTER3: C32.1 D7.A L4.2 LOAD3.2 POE_LED3.2
5V_FILTER4: C40.1 D9.A L5.2 LOAD4.2 POE_LED4.2
5V_FILTER5: C48.1 D11.A L6.2 LOAD5.2 POE_LED5.2
5V_FILTER6: C56.1 D13.A L7.2 LOAD6.2 POE_LED6.2
5V_FILTER7: C64.1 D15.A L8.2 LOAD7.2 POE_LED7.2
5V_RAW: C7.1 C8.+ C25.1 L1.1 U1.1 U1.2
5V_RAW1: C6.+ C9.1 C10.1 L2.1 U3.1 U3.2
5V_RAW2: C17.+ C18.1 C20.1 L3.1 U6.1 U6.2
5V_RAW3: C29.+ C30.1 C31.1 L4.1 U8.1 U8.2
5V_RAW4: C37.+ C38.1 C39.1 L5.1 U10.1 U10.2
5V_RAW5: C45.+ C46.1 C47.1 L6.1 U12.1 U12.2
5V_RAW6: C53.+ C54.1 C55.1 L7.1 U14.1 U14.2
5V_RAW7: C61.+ C62.1 C63.1 L8.1 U16.1 U16.2
GND: C3.2 C7.2 C8.- C13.2 C19.2 C24.2 C25.2 C26.2 D5.C J1.12 J2.GND J3.1 J3.3 R2.1 U1.3 U4.2
GND1: C1.2 C2.2 C4.2 C5.2 C6.- C9.2 C10.2 C11.2 D3.C J4.12 J5.GND J6.1 J6.3 R4.1 U2.2 U3.3
GND2: C12.2 C14.2 C15.2 C16.2 C17.- C18.2 C20.2 C21.2 D6.C J7.12 J8.GND J9.1 J9.3 R7.1 U5.2 U6.3
GND3: C22.2 C23.2 C27.2 C28.2 C29.- C30.2 C31.2 C32.2 D8.C J10.12 J11.GND J12.1 J12.3 R10.1 U7.2 U8.3
GND4: C33.2 C34.2 C35.2 C36.2 C37.- C38.2 C39.2 C40.2 D10.C J13.12 J14.GND J15.1 J15.3 R14.1 U9.2 U10.3
GND5: C41.2 C42.2 C43.2 C44.2 C45.- C46.2 C47.2 C48.2 D12.C J16.12 J17.GND J18.1 J18.3 R17.1 U11.2 U12.3
GND6: C49.2 C50.2 C51.2 C52.2 C53.- C54.2 C55.2 C56.2 D14.C J19.12 J20.GND J21.1 J21.3 R20.1 U13.2 U14.3
GND7: C57.2 C58.2 C59.2 C60.2 C61.- C62.2 C63.2 C64.2 D16.C J22.12 J23.GND J24.1 J24.3 R23.1 U15.2 U16.3
GND-ISO: C19.1 J1.7 J1.8 J1.S1 J1.S2
GND-ISO1: C4.1 J4.7 J4.8 J4.S1 J4.S2
GND-ISO2: C15.1 J7.7 J7.8 J7.S1 J7.S2
GND-ISO3: C27.1 J10.7 J10.8 J10.S1 J10.S2
GND-ISO4: C35.1 J13.7 J13.8 J13.S1 J13.S2
GND-ISO5: C43.1 J16.7 J16.8 J16.S1 J16.S2
GND-ISO6: C51.1 J19.7 J19.8 J19.S1 J19.S2
GND-ISO7: C59.1 J22.7 J22.8 J22.S1 J22.S2
N$1: J4.11 R1.1
N$2: LOAD1.1 R4.2
N$3: POE_LED1.1 R5.2
N$4: D3.A R5.1
N$5: D5.A R11.1
N$6: POE_LED.1 R11.2
N$7: J7.11 R6.1
N$8: LOAD2.1 R7.2
N$9: LOAD.1 R2.2
N$10: J1.11 R3.1
N$11: POE_LED2.1 R8.2
N$12: D6.A R8.1
N$13: J10.11 R9.1
N$14: LOAD3.1 R10.2
N$15: POE_LED3.1 R12.2
N$16: D8.A R12.1
N$17: J13.11 R13.1
N$18: LOAD4.1 R14.2
N$19: POE_LED4.1 R15.2
N$20: D10.A R15.1
N$21: J16.11 R16.1
N$22: LOAD5.1 R17.2
N$23: POE_LED5.1 R18.2
N$24: D12.A R18.1
N$25: J19.11 R19.1
N$26: LOAD6.1 R20.2
N$27: POE_LED6.1 R21.2
N$28: D14.A R21.1
N$29: J22.11 R22.1
N$30: LOAD7.1 R23.2
N$31: POE_LED7.1 R24.2
N$32: D16.A R24.1
PW+: J1.9 U1.5 U1.6
PW+1: J4.9 U3.5 U3.6
PW+2: J7.9 U6.5 U6.6
PW+3: J10.9 U8.5 U8.6
PW+4: J13.9 U10.5 U10.6
PW+5: J16.9 U12.5 U12.6
PW+6: J19.9 U14.5 U14.6
PW+7: J22.9 U16.5 U16.6
PW-: J1.10 U1.7 U1.8
PW-1: J4.10 U3.7 U3.8
PW-2: J7.10 U6.7 U6.8
PW-3: J10.10 U8.7 U8.8
PW-4: J13.10 U10.7 U10.8
PW-5: J16.10 U12.7 U12.8
PW-6: J19.10 U14.7 U14.8
PW-7: J22.10 U16.7 U16.8

## Tracks (layer width: path | path; a pad name or v marks a point on that pad's centre or on a via)
3.3V  (via drill 0.38)
  Top 0.559: R3.2 31.12,30.9 U4.5 30.67,29.21 30.67,29.14 v30.61,29.08 30.61,27.98 C24.1
  Bottom 0.559: J3.2 22.1,29.84 23.11,30.86 28.83,30.86 v30.61,29.08
3.3V1  (via drill 0.38)
  Top 0.559: R1.2 59.57,30.9 U2.5 59.12,29.21 59.12,29.14 v59.05,29.08 59.05,27.98 C5.1
  Bottom 0.559: J6.2 50.55,29.84 51.56,30.86 57.28,30.86 v59.05,29.08
3.3V2  (via drill 0.38)
  Top 0.559: R6.2 88.01,30.9 U5.5 87.56,29.21 87.56,29.14 v87.5,29.08 87.5,27.98 C16.1
  Bottom 0.559: J9.2 78.99,29.84 80.01,30.86 85.73,30.86 v87.5,29.08
3.3V3  (via drill 0.38)
  Top 0.559: R9.2 116.46,30.9 U7.5 116.01,29.21 116.01,29.14 v115.95,29.08 115.95,27.98 C28.1
  Bottom 0.559: J12.2 107.44,29.84 108.46,30.86 114.17,30.86 v115.95,29.08
3.3V4  (via drill 0.38)
  Top 0.559: R13.2 31.12,100.75 U9.5 30.67,99.06 30.67,98.99 v30.61,98.93 30.61,97.83 C36.1
  Bottom 0.559: J15.2 22.1,99.69 23.11,100.71 28.83,100.71 v30.61,98.93
3.3V5  (via drill 0.38)
  Top 0.559: R16.2 59.57,100.75 U11.5 59.12,99.06 59.12,98.99 v59.05,98.93 59.05,97.83 C44.1
  Bottom 0.559: J18.2 50.55,99.69 51.56,100.71 57.28,100.71 v59.05,98.93
3.3V6  (via drill 0.38)
  Top 0.559: R19.2 88.01,100.75 U13.5 87.56,99.06 87.56,98.99 v87.5,98.93 87.5,97.83 C52.1
  Bottom 0.559: J21.2 78.99,99.69 80.01,100.71 85.73,100.71 v87.5,98.93
3.3V7  (via drill 0.38)
  Top 0.559: R22.2 116.46,100.75 U15.5 116.01,99.06 116.01,98.99 v115.95,98.93 115.95,97.83 C60.1
  Bottom 0.559: J24.2 107.44,99.69 108.46,100.71 114.17,100.71 v115.95,98.93
5V
  Top 0.559: D1.C 28.75,37.98 C13.1 C3.1 28.77,35.46 28.77,34.29 | U4.1 30.67,34.1 30.48,34.29 28.77,34.29 | 28.77,34.29 U4.3 28.77,32.07 27.56,30.86 18.67,30.86 J3.4 17.33,28.9 J2.VBUS
5V1
  Top 0.559: D2.C 57.2,37.98 C1.1 C2.1 57.22,35.46 57.22,34.29 | U2.1 59.12,34.1 58.93,34.29 57.22,34.29 | 57.22,34.29 U2.3 57.22,32.07 56.01,30.86 47.12,30.86 J6.4 45.78,28.9 J5.VBUS
5V2
  Top 0.559: D4.C 85.64,37.98 C12.1 C14.1 85.66,35.46 85.66,34.29 | U5.1 87.56,34.1 87.38,34.29 85.66,34.29 | 85.66,34.29 U5.3 85.66,32.07 84.45,30.86 75.56,30.86 J9.4 74.22,28.9 J8.VBUS
5V3
  Top 0.559: D7.C 114.09,37.98 C22.1 C23.1 114.11,35.46 114.11,34.29 | U7.1 116.01,34.1 115.82,34.29 114.11,34.29 | 114.11,34.29 U7.3 114.11,32.07 112.9,30.86 104.01,30.86 J12.4 102.67,28.9 J11.VBUS
5V4
  Top 0.559: D9.C 28.75,107.83 C33.1 C34.1 28.77,105.31 28.77,104.14 | U9.1 30.67,103.95 30.48,104.14 28.77,104.14 | 28.77,104.14 U9.3 28.77,101.92 27.56,100.71 18.67,100.71 J15.4 17.33,98.75 J14.VBUS
5V5
  Top 0.559: D11.C 57.2,107.83 C41.1 C42.1 57.22,105.31 57.22,104.14 | U11.1 59.12,103.95 58.93,104.14 57.22,104.14 | 57.22,104.14 U11.3 57.22,101.92 56.01,100.71 47.12,100.71 J18.4 45.78,98.75 J17.VBUS
5V6
  Top 0.559: D13.C 85.64,107.83 C49.1 C50.1 85.66,105.31 85.66,104.14 | U13.1 87.56,103.95 87.38,104.14 85.66,104.14 | 85.66,104.14 U13.3 85.66,101.92 84.45,100.71 75.56,100.71 J21.4 74.22,98.75 J20.VBUS
5V7
  Top 0.559: D15.C 114.09,107.83 C57.1 C58.1 114.11,105.31 114.11,104.14 | U15.1 116.01,103.95 115.82,104.14 114.11,104.14 | 114.11,104.14 U15.3 114.11,101.92 112.9,100.71 104.01,100.71 J24.4 102.67,98.75 J23.VBUS
5V_FILTER  (via drill 0.38)
  Top 0.559: L1.2 24.54,36.03 C26.1 25.79,35.93 26.04,35.68 D1.A v27.18,34.29
  Bottom 0.178: LOAD.2 24.64,33.54 24.4,33.54 15,33.54 13.73,32.27 POE_LED.2
  Bottom 0.559: v27.18,34.29 27.18,33.78 26.94,33.54 LOAD.2
5V_FILTER1  (via drill 0.38)
  Top 0.559: L2.2 52.99,36.03 C11.1 54.24,35.93 54.49,35.68 D2.A v55.63,34.29
  Bottom 0.178: LOAD1.2 53.09,33.54 52.84,33.54 43.45,33.54 42.18,32.27 POE_LED1.2
  Bottom 0.559: v55.63,34.29 55.63,33.78 55.38,33.54 LOAD1.2
5V_FILTER2  (via drill 0.38)
  Top 0.559: L3.2 81.43,36.03 C21.1 82.69,35.93 82.94,35.68 D4.A v84.07,34.29
  Bottom 0.178: LOAD2.2 81.53,33.54 81.29,33.54 71.9,33.54 70.62,32.27 POE_LED2.2
  Bottom 0.559: v84.07,34.29 84.07,33.78 83.83,33.54 LOAD2.2
5V_FILTER3  (via drill 0.38)
  Top 0.559: L4.2 109.88,36.03 C32.1 111.14,35.93 111.39,35.68 D7.A v112.52,34.29
  Bottom 0.178: LOAD3.2 109.98,33.54 109.74,33.54 100.34,33.54 99.07,32.27 POE_LED3.2
  Bottom 0.559: v112.52,34.29 112.52,33.78 112.28,33.54 LOAD3.2
5V_FILTER4  (via drill 0.38)
  Top 0.559: L5.2 24.54,105.88 C40.1 25.79,105.78 26.04,105.53 D9.A v27.18,104.14
  Bottom 0.178: LOAD4.2 24.64,103.39 24.4,103.39 15,103.39 13.73,102.12 POE_LED4.2
  Bottom 0.559: v27.18,104.14 27.18,103.63 26.94,103.39 LOAD4.2
5V_FILTER5  (via drill 0.38)
  Top 0.559: L6.2 52.99,105.88 C48.1 54.24,105.78 54.49,105.53 D11.A v55.63,104.14
  Bottom 0.178: LOAD5.2 53.09,103.39 52.84,103.39 43.45,103.39 42.18,102.12 POE_LED5.2
  Bottom 0.559: v55.63,104.14 55.63,103.63 55.38,103.39 LOAD5.2
5V_FILTER6  (via drill 0.38)
  Top 0.559: L7.2 81.43,105.88 C56.1 82.69,105.78 82.94,105.53 D13.A v84.07,104.14
  Bottom 0.178: LOAD6.2 81.53,103.39 81.29,103.39 71.9,103.39 70.62,102.12 POE_LED6.2
  Bottom 0.559: v84.07,104.14 84.07,103.63 83.83,103.39 LOAD6.2
5V_FILTER7  (via drill 0.38)
  Top 0.559: L8.2 109.88,105.88 C64.1 111.14,105.78 111.39,105.53 D15.A v112.52,104.14
  Bottom 0.178: LOAD7.2 109.98,103.39 109.74,103.39 100.34,103.39 99.07,102.12 POE_LED7.2
  Bottom 0.559: v112.52,104.14 112.52,103.63 112.28,103.39 LOAD7.2
5V_RAW
  Top 0.559: 14.04,37.72 U1.2 U1.1 | 14.04,37.72 14.04,37.15 13.58,36.69 C8.+ | 14.04,37.72 17.01,37.72 C25.1 C7.1 22,37.73 L1.1
5V_RAW1
  Top 0.559: 42.49,37.72 U3.2 U3.1 | 42.49,37.72 42.49,37.15 42.02,36.69 C6.+ | 42.49,37.72 45.45,37.72 C10.1 C9.1 50.45,37.73 L2.1
5V_RAW2
  Top 0.559: 70.93,37.72 U6.2 U6.1 | 70.93,37.72 70.93,37.15 70.47,36.69 C17.+ | 70.93,37.72 73.9,37.72 C20.1 C18.1 78.89,37.73 L3.1
5V_RAW3
  Top 0.559: 99.38,37.72 U8.2 U8.1 | 99.38,37.72 99.38,37.15 98.92,36.69 C29.+ | 99.38,37.72 C31.1 C30.1 107.34,37.73 L4.1
5V_RAW4
  Top 0.559: 14.04,107.57 U10.2 U10.1 | 14.04,107.57 14.04,107 13.58,106.54 C37.+ | 14.04,107.57 17.01,107.57 C39.1 C38.1 22,107.58 L5.1
5V_RAW5
  Top 0.559: 42.49,107.57 U12.2 U12.1 | 42.49,107.57 42.49,107 42.02,106.54 C45.+ | 42.49,107.57 45.45,107.57 C47.1 C46.1 50.45,107.58 L6.1
5V_RAW6
  Top 0.559: 70.93,107.57 U14.2 U14.1 | 70.93,107.57 70.93,107 70.47,106.54 C53.+ | 70.93,107.57 73.9,107.57 C55.1 C54.1 78.89,107.58 L7.1
5V_RAW7
  Top 0.559: 99.38,107.57 U16.2 U16.1 | 99.38,107.57 99.38,107 98.92,106.54 C61.+ | 99.38,107.57 C63.1 C62.1 107.34,107.58 L8.1
GND  (via drill 0.38)  (24 unrouted)
  Top 0.178: J1.12 26.44,72.39 28.45,72.39 33.9,66.94 33.9,38.47 33.53,38.1 C13.2
  Top 0.559: J2.GND 24.33,28.9 J3.1 | C19.2 8.76,43.81 9.4,43.18
  other vias: 29.72,31.75 11.94,34.29 13.21,25.4 17.02,34.8 17.65,32.51 26.16,37.08 32.26,35.56 32.26,38.1 27.18,27.94 24.26,23.24 27.56,44.07
  pour Top (isolate 0.178): 6.86,46.23 34.8,46.23 34.8,19.05 6.86,19.05
  pour Bottom (isolate 0.178): 6.86,46.23 34.8,46.23 34.8,19.05 6.86,19.05
GND1  (via drill 0.38)  (24 unrouted)
  Top 0.178: J4.12 54.89,72.39 56.9,72.39 62.35,66.94 62.35,38.47 61.98,38.1 C1.2
  Top 0.559: J5.GND 52.78,28.9 J6.1 | C4.2 37.21,43.81 37.85,43.18
  other vias: 58.17,31.75 40.39,34.29 41.66,25.4 45.47,34.8 46.1,32.51 54.61,37.08 60.71,35.56 60.71,38.1 55.63,27.94 52.7,23.24 56.01,44.07
  pour Top (isolate 0.178): 35.31,46.23 63.25,46.23 63.25,19.05 35.31,19.05
  pour Bottom (isolate 0.178): 35.31,46.23 63.25,46.23 63.25,19.05 35.31,19.05
GND2  (via drill 0.38)  (24 unrouted)
  Top 0.178: J7.12 83.33,72.39 85.34,72.39 90.8,66.94 90.8,38.47 90.42,38.1 C12.2
  Top 0.559: J8.GND 81.22,28.9 J9.1 | C15.2 65.66,43.81 66.29,43.18
  other vias: 86.61,31.75 68.83,34.29 70.1,25.4 73.91,34.8 74.55,32.51 83.06,37.08 89.15,35.56 89.15,38.1 84.07,27.94 81.15,23.24 84.45,44.07
  pour Top (isolate 0.178): 63.75,46.23 91.69,46.23 91.69,19.05 63.75,19.05
  pour Bottom (isolate 0.178): 63.75,46.23 91.69,46.23 91.69,19.05 63.75,19.05
GND3  (via drill 0.38)  (24 unrouted)
  Top 0.178: J10.12 111.78,72.39 113.79,72.39 119.25,66.94 119.25,38.47 118.87,38.1 C22.2
  Top 0.559: J11.GND 109.67,28.9 J12.1 | C27.2 94.11,43.81 94.74,43.18
  other vias: 115.06,31.75 97.28,34.29 98.55,25.4 102.36,34.8 103,32.51 111.51,37.08 117.6,35.56 117.6,38.1 112.52,27.94 109.6,23.24 112.9,44.07
  pour Top (isolate 0.178): 92.2,46.23 120.14,46.23 120.14,19.05 92.2,19.05
  pour Bottom (isolate 0.178): 92.2,46.23 120.14,46.23 120.14,19.05 92.2,19.05
GND4  (via drill 0.38)  (24 unrouted)
  Top 0.178: J13.12 26.44,142.24 28.45,142.24 33.9,136.79 33.9,108.32 33.53,107.95 C33.2
  Top 0.559: J14.GND 24.33,98.75 J15.1 | C35.2 8.76,113.66 9.4,113.03
  other vias: 29.72,101.6 11.94,104.14 13.21,95.25 17.02,104.65 17.65,102.36 26.16,106.93 32.26,105.41 32.26,107.95 27.18,97.79 24.26,93.09 27.56,113.92
  pour Top (isolate 0.178): 6.86,116.08 34.8,116.08 34.8,88.9 6.86,88.9
  pour Bottom (isolate 0.178): 6.86,116.08 34.8,116.08 34.8,88.9 6.86,88.9
GND5  (via drill 0.38)  (24 unrouted)
  Top 0.178: J16.12 54.89,142.24 56.9,142.24 62.35,136.79 62.35,108.32 61.98,107.95 C41.2
  Top 0.559: J17.GND 52.78,98.75 J18.1 | C43.2 37.21,113.66 37.85,113.03
  other vias: 58.17,101.6 40.39,104.14 41.66,95.25 45.47,104.65 46.1,102.36 54.61,106.93 60.71,105.41 60.71,107.95 55.63,97.79 52.7,93.09 56.01,113.92
  pour Top (isolate 0.178): 35.31,116.08 63.25,116.08 63.25,88.9 35.31,88.9
  pour Bottom (isolate 0.178): 35.31,116.08 63.25,116.08 63.25,88.9 35.31,88.9
GND6  (via drill 0.38)  (24 unrouted)
  Top 0.178: J19.12 83.33,142.24 85.34,142.24 90.8,136.79 90.8,108.32 90.42,107.95 C49.2
  Top 0.559: J20.GND 81.22,98.75 J21.1 | C51.2 65.66,113.66 66.29,113.03
  other vias: 86.61,101.6 68.83,104.14 70.1,95.25 73.91,104.65 74.55,102.36 83.06,106.93 89.15,105.41 89.15,107.95 84.07,97.79 81.15,93.09 84.45,113.92
  pour Top (isolate 0.178): 63.75,116.08 91.69,116.08 91.69,88.9 63.75,88.9
  pour Bottom (isolate 0.178): 63.75,116.08 91.69,116.08 91.69,88.9 63.75,88.9
GND7  (via drill 0.38)  (24 unrouted)
  Top 0.178: J22.12 111.78,142.24 113.79,142.24 119.25,136.79 119.25,108.32 118.87,107.95 C57.2
  Top 0.559: J23.GND 109.67,98.75 J24.1 | C59.2 94.11,113.66 94.74,113.03
  other vias: 115.06,101.6 97.28,104.14 98.55,95.25 102.36,104.65 103,102.36 111.51,106.93 117.6,105.41 117.6,107.95 112.52,97.79 109.6,93.09 112.9,113.92
  pour Top (isolate 0.178): 92.2,116.08 120.14,116.08 120.14,88.9 92.2,88.9
  pour Bottom (isolate 0.178): 92.2,116.08 120.14,116.08 120.14,88.9 92.2,88.9
GND-ISO
  Top 0.559: 17.65,66.8 J1.S2 11.43,66.8 8.76,64.14 C19.1 | 17.65,66.8 J1.S1 | 17.65,66.8 J1.8 17.65,62.23 J1.7
GND-ISO1
  Top 0.559: 46.1,66.8 J4.S2 39.88,66.8 37.21,64.14 C4.1 | 46.1,66.8 J4.S1 | 46.1,66.8 J4.8 46.1,62.23 J4.7
GND-ISO2
  Top 0.559: 74.55,66.8 J7.S2 68.32,66.8 65.66,64.14 C15.1 | 74.55,66.8 J7.S1 | 74.55,66.8 J7.8 74.55,62.23 J7.7
GND-ISO3
  Top 0.559: 103,66.8 J10.S2 96.77,66.8 94.11,64.14 C27.1 | 103,66.8 J10.S1 | 103,66.8 J10.8 103,62.23 J10.7
GND-ISO4
  Top 0.559: 17.65,136.65 J13.S2 11.43,136.65 8.76,133.99 C35.1 | 17.65,136.65 J13.S1 | 17.65,136.65 J13.8 17.65,132.08 J13.7
GND-ISO5
  Top 0.559: 46.1,136.65 J16.S2 39.88,136.65 37.21,133.99 C43.1 | 46.1,136.65 J16.S1 | 46.1,136.65 J16.8 46.1,132.08 J16.7
GND-ISO6
  Top 0.559: 74.55,136.65 J19.S2 68.32,136.65 65.66,133.99 C51.1 | 74.55,136.65 J19.S1 | 74.55,136.65 J19.8 74.55,132.08 J19.7
GND-ISO7
  Top 0.559: 103,136.65 J22.S2 96.77,136.65 94.11,133.99 C59.1 | 103,136.65 J22.S1 | 103,136.65 J22.8 103,132.08 J22.7
N$1
  Top 0.178: R1.1 62.71,34.6 62.71,67.11 J4.11
N$2  (via drill 0.38)
  Top 0.559: v55.88,32.51 54.36,32.51 53.85,33.02 R4.2
  Bottom 0.559: LOAD1.1 54.37,32.51 v55.88,32.51
N$3  (via drill 0.3)
  Top 0.178: v39.88,29.21 39.62,29.21 39.12,28.7 39.12,26.89 R5.2
  Bottom 0.178: v39.88,29.21 39.88,28.45 40.39,27.94 POE_LED1.1
N$4
  Top 0.178: D3.A 38.24,26.06 R5.1
N$5
  Top 0.178: D5.A 9.79,26.06 R11.1
N$6  (via drill 0.3)
  Top 0.178: v11.43,29.21 11.18,29.21 10.67,28.7 10.67,26.89 R11.2
  Bottom 0.178: v11.43,29.21 11.43,28.45 11.94,27.94 POE_LED.1
N$7
  Top 0.178: R6.1 91.15,34.6 91.15,67.11 J7.11
N$8  (via drill 0.38)
  Top 0.559: v84.33,32.51 82.8,32.51 82.3,33.02 R7.2
  Bottom 0.559: LOAD2.1 82.82,32.51 v84.33,32.51
N$9  (via drill 0.38)
  Top 0.559: v27.43,32.51 25.91,32.51 25.4,33.02 R2.2
  Bottom 0.559: LOAD.1 25.92,32.51 v27.43,32.51
N$10
  Top 0.178: R3.1 34.26,34.6 34.26,67.11 J1.11
N$11  (via drill 0.3)
  Top 0.178: v68.33,29.21 68.07,29.21 67.56,28.7 67.56,26.89 R8.2
  Bottom 0.178: v68.33,29.21 68.33,28.45 68.83,27.94 POE_LED2.1
N$12
  Top 0.178: D6.A 66.69,26.06 R8.1
N$13
  Top 0.178: R9.1 119.6,34.6 119.6,67.11 J10.11
N$14  (via drill 0.38)
  Top 0.559: v112.78,32.51 111.25,32.51 110.74,33.02 R10.2
  Bottom 0.559: LOAD3.1 111.27,32.51 v112.78,32.51
N$15  (via drill 0.3)
  Top 0.178: v96.77,29.21 96.52,29.21 96.01,28.7 96.01,26.89 R12.2
  Bottom 0.178: v96.77,29.21 96.77,28.45 97.28,27.94 POE_LED3.1
N$16
  Top 0.178: D8.A 95.14,26.06 R12.1
N$17
  Top 0.178: R13.1 34.26,104.45 34.26,136.96 J13.11
N$18  (via drill 0.38)
  Top 0.559: v27.43,102.36 25.91,102.36 25.4,102.87 R14.2
  Bottom 0.559: LOAD4.1 25.92,102.36 v27.43,102.36
N$19  (via drill 0.3)
  Top 0.178: v11.43,99.06 11.18,99.06 10.67,98.55 10.67,96.73 R15.2
  Bottom 0.178: v11.43,99.06 11.43,98.3 11.94,97.79 POE_LED4.1
N$20
  Top 0.178: D10.A 9.79,95.91 R15.1
N$21
  Top 0.178: R16.1 62.71,104.45 62.71,136.96 J16.11
N$22  (via drill 0.38)
  Top 0.559: v55.88,102.36 54.36,102.36 53.85,102.87 R17.2
  Bottom 0.559: LOAD5.1 54.37,102.36 v55.88,102.36
N$23  (via drill 0.3)
  Top 0.178: v39.88,99.06 39.62,99.06 39.12,98.55 39.12,96.73 R18.2
  Bottom 0.178: v39.88,99.06 39.88,98.3 40.39,97.79 POE_LED5.1
N$24
  Top 0.178: D12.A 38.24,95.91 R18.1
N$25
  Top 0.178: R19.1 91.15,104.45 91.15,136.96 J19.11
N$26  (via drill 0.38)
  Top 0.559: v84.33,102.36 82.8,102.36 82.3,102.87 R20.2
  Bottom 0.559: LOAD6.1 82.82,102.36 v84.33,102.36
N$27  (via drill 0.3)
  Top 0.178: v68.33,99.06 68.07,99.06 67.56,98.55 67.56,96.73 R21.2
  Bottom 0.178: v68.33,99.06 68.33,98.3 68.83,97.79 POE_LED6.1
N$28
  Top 0.178: D14.A 66.69,95.91 R21.1
N$29
  Top 0.178: R22.1 119.6,104.45 119.6,136.96 J22.11
N$30  (via drill 0.38)
  Top 0.559: v112.78,102.36 111.25,102.36 110.74,102.87 R23.2
  Bottom 0.559: LOAD7.1 111.27,102.36 v112.78,102.36
N$31  (via drill 0.3)
  Top 0.178: v96.77,99.06 96.52,99.06 96.01,98.55 96.01,96.73 R24.2
  Bottom 0.178: v96.77,99.06 96.77,98.3 97.28,97.79 POE_LED7.1
N$32
  Top 0.178: D16.A 95.14,95.91 R24.1
PW+
  Top 0.559: J1.9 16.38,57.78 18.81,55.36 U1.6 U1.5
PW+1
  Top 0.559: J4.9 44.83,57.78 47.26,55.36 U3.6 U3.5
PW+2
  Top 0.559: J7.9 73.28,57.78 75.7,55.36 U6.6 U6.5
PW+3
  Top 0.559: J10.9 101.73,57.78 104.15,55.36 U8.6 U8.5
PW+4
  Top 0.559: J13.9 16.38,127.63 18.81,125.21 U10.6 U10.5
PW+5
  Top 0.559: J16.9 44.83,127.63 47.26,125.21 U12.6 U12.5
PW+6
  Top 0.559: J19.9 73.28,127.63 75.7,125.21 U14.6 U14.5
PW+7
  Top 0.559: J22.9 101.73,127.63 104.15,125.21 U16.6 U16.5
PW-
  Top 0.559: J1.10 14.04,62.42 U1.7 U1.8
PW-1
  Top 0.559: J4.10 42.49,62.42 U3.7 U3.8
PW-2
  Top 0.559: J7.10 70.93,62.42 U6.7 U6.8
PW-3
  Top 0.559: J10.10 99.38,62.42 U8.7 U8.8
PW-4
  Top 0.559: J13.10 14.04,132.28 U10.7 U10.8
PW-5
  Top 0.559: J16.10 42.49,132.28 U12.7 U12.8
PW-6
  Top 0.559: J19.10 70.93,132.28 U14.7 U14.8
PW-7
  Top 0.559: J22.10 99.38,132.28 U16.7 U16.8

## Text on the board
Bottom: x02 | x02 | x02 | x02 | x02 | x02 | x02 | x02
Dimension: Route Out | Route Out | Route Out | Route Out | Route Out | Route Out | Route Out | Route Out | Route Out | Route Out | Route Out | Route Out
Milling: v-score | v-score | v-score | v-score | v-score